# Altium PCB Hall Digital Sensor.PcbDoc
Units mm, origin at the board's own origin, x right, y up, seen from the top; angles counter-clockwise.
Board outline 152.4 x 101.6 mm, 2 copper layers (Top Layer, Bottom Layer); 6 components, 5 nets, 16 pads, 1 vias.
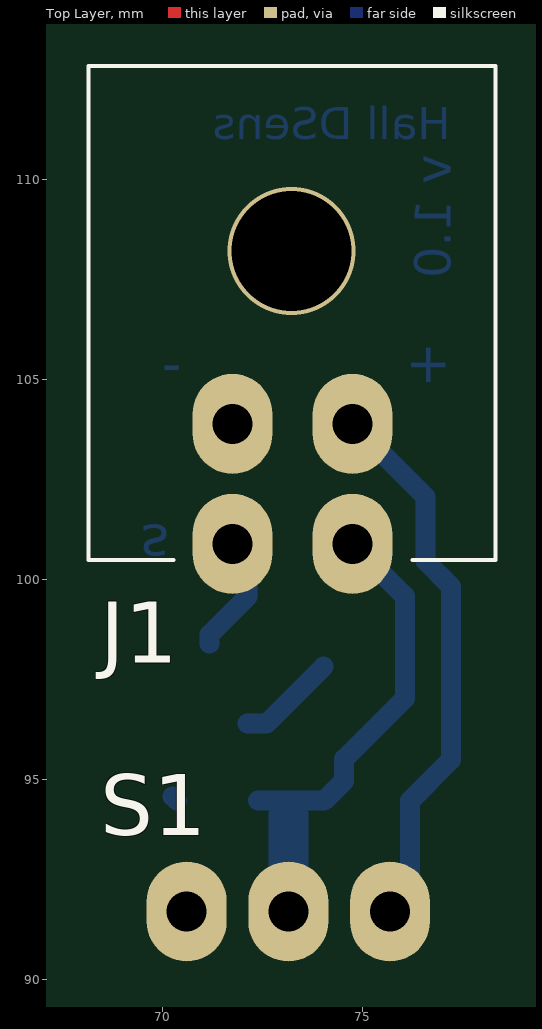
[diagram p0: Top Layer view]
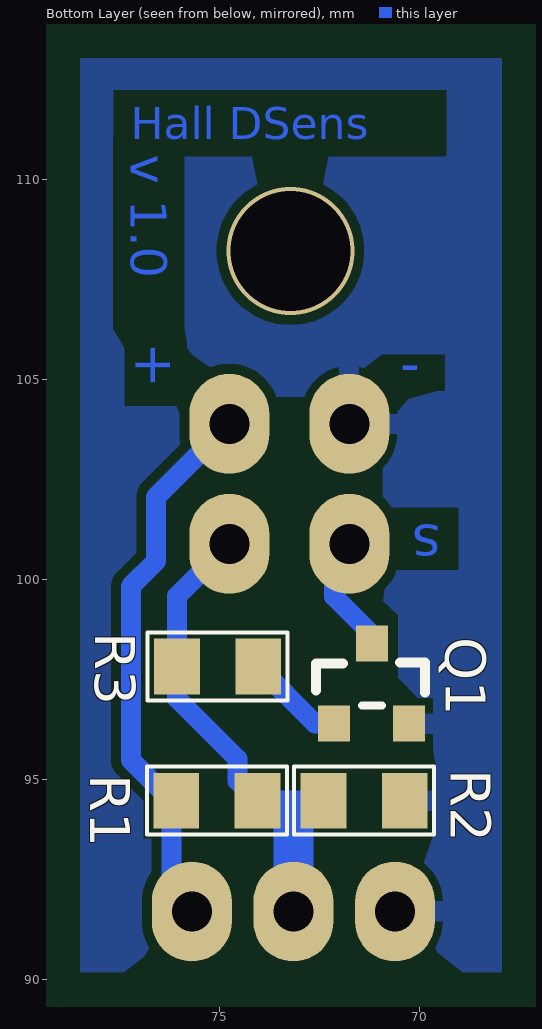
[diagram p1: Bottom Layer view, seen from below]
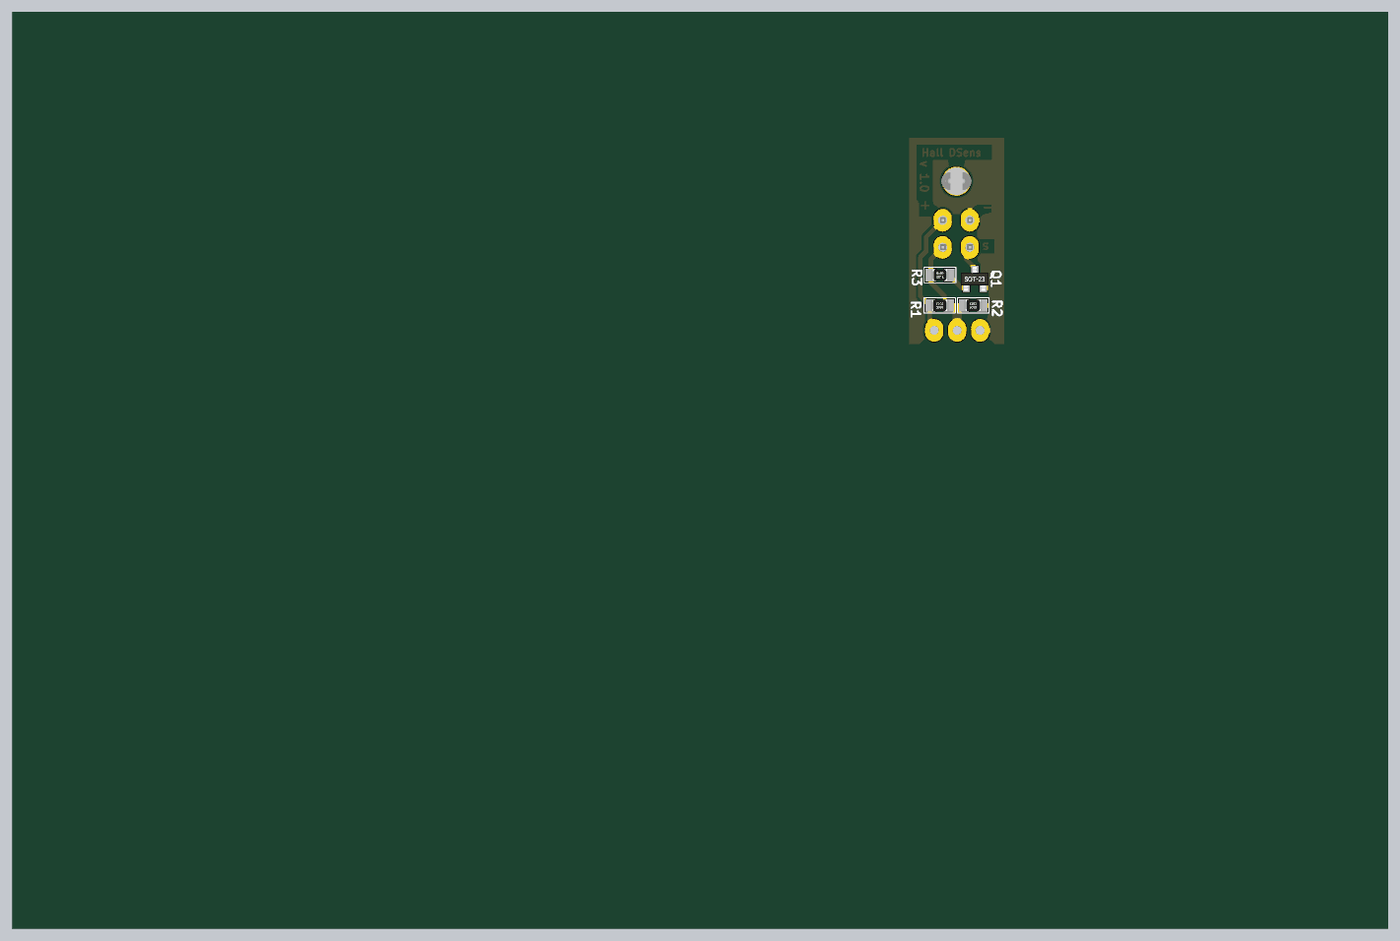
[diagram p2: 3D render of the assembled board from below, using the file's embedded part models]

## Layer stack, top to bottom
Top Solder: solder mask 0.0102, Solder Resist, Dk 3.5
Top Layer: signal copper 0.0356
Dielectric 1: dielectric 0.32, FR-4, Dk 4.8
Bottom Layer: signal copper 0.0356
Bottom Solder: solder mask 0.0102, Solder Resist, Dk 3.5

## Board outline
25.4,25.4 177.8,25.4 177.8,127 25.4,127

## Design rules (kind name [scope] priority, off if disabled: settings)
Clearance [All] p1: gap=0.254
PlaneConnect [All] p1: planeconnectstyle=Relief reliefexpansion=0.508 reliefentries=4 reliefconductorwidth=0.254 reliefairgap=0.5
PolygonConnect [All] p1: connectstyle=Relief reliefconductorwidth=0.5 reliefentries=4 polygonreliefangle="90 Angle" airgapwidth=0.2
RoutingVias [All] p1: holewidth=0.711 width=1.27 viastyle="Through Hole" minholewidth=0.711 minwidth=1.27 maxholewidth=0.711 maxwidth=1.27
SolderMaskExpansion [All] p1: expansion=0.102
Width [All] p1: maxlimit=2 minlimit=0.254 preferedwidth=0.5
28 further rules are at their usual default settings.

## Components (designator, comment, footprint, x,y, rotation, side; value= is the part's Value field where it differs from the comment)
J1 "Connector" "Molex Micro-Fit 3.0 - 4 pin D R" 71.755,103.886 r180 top
Q1 "BC817-40" SOT-23 72.136,96.393 r180 bottom
R1 "10kOm" "SMD 0805 (2012)" 74.041,94.488 r0 bottom
R2 "10kOm" "SMD 0805 (2012)" 70.358,94.488 r0 bottom
R3 "330Om" "SMD 0805 (2012)" 76.073,97.79 r180 bottom
S1 "Hall Sens" "Hall Sensor 3Pin" 70.612,91.694 r90 top

## Footprints (in the part's own frame and the unit in brackets; to place one, negate y for a bottom-side part, rotate by r counter-clockwise, add the part's x,y. Pads: shape width x height; smd on the part's side, far side on the other; paste and mask are expansions set on the pad)
"Hall Sensor 3Pin" [mm]
  oval 2.5x2 hole 1: Gnd(0,0) O+(0,-2.54) Vcc(0,-5.08)
  body extent -0.5,-6 0.5,1, height 6
"Molex Micro-Fit 3.0 - 4 pin D R" [mm]
  oval 2x2.5 hole 1: 1(0,0) 2(-3,0) 3(0,3) 4(-3,3)
  silkscreen extent -6.58,-8.95 3.6,3.4, body extent -6.55,-8.94 3.6,3.3, height 8.83
"SMD 0805 (2012)" [mil]
  rect 45x55 smd: 1(0.35,0.98) 2(80.35,0.98)
  silkscreen extent -29,-32 109,34, body extent 1,-24 80,26, height 18
SOT-23 [mm]
  rect 0.8x0.9 smd: 1(0,0) 2(1.875,0) 3(0.95,2)
  silkscreen extent -0.45,0.45 2.27,1.53, body extent -0.57,-0.32 2.43,2.32, height 1.08

## Part data
J1: library part "Micro-Fit 4R (2x2)", "Horisontal, Dbl line, Male - 3mm"
Q1: "NPN 45 V, 500 mA NPN general-purpose transistor"
R1 R2 R3: library part "Res All Types"
S1: library part "Hall Sensor K1116KP8"

## Via types
v1: diameter 3.2, hole 3, Top Layer to Bottom Layer, 1 vias

## Nets (pads, with @x,y where several pads share a name; then routed paths per layer and width w, separated by ;. In a path a pad name is that pad's centre, name@x,y a point inside that pad or via, vN(x,y) a via of type N, cw(c..) or ccw(c..) an arc to the next point about the centre after c; other vN are vias at no path point)
GND: J1.1 Q1.2 R2.1 S1.Gnd | length 0.1
  Bottom Layer w0.5: R2.1@70.261,94.569 R2.1
NetQ1_1: Q1.1 R3.2 | length 2.5
  Bottom Layer w0.5: Q1.1 72.61,96.393 R3.2
SENSAN: J1.4 R1.1 R2.2 R3.1 S1.O+ | length 11.9
  Bottom Layer w0.5: R2.2 R1.1 74.549,94.962 74.549,95.504 76.064,97.019 R3.1 76.064,99.577 J1.4
  Bottom Layer w1: S1.O+ 73.152,94.107
SENSOUT: J1.3 Q1.3 | length 3
  Bottom Layer w0.5: Q1.3 71.186,98.618 72.136,99.568 72.136,100.505 J1.3
VCC: J1.2 R1.2 S1.Vcc | length 14.1
  Bottom Layer w0.5: J1.2 76.581,102.06 76.581,100.457 77.216,99.822 77.216,95.479 76.2,94.463 76.2,91.694 S1.Vcc
copper on no net:
  other v1: 73.23,108.211

## Polygon pours and split planes (outlines as drawn)
GND on Bottom Layer "Top Layer-No Net" (solid, remove dead copper, pour order 2): 67.945,113.03 78.486,113.03 78.486,90.17 67.945,90.17 67.945,113.03

## Other copper
Bottom Layer:
  text "Hall DSens" at 77.216,110.998 h0.8
  text "v 1.0" at 77.216,110.617 h0.9 r90
  text "-" at 70.485,105.664 h1 r180
  text "+" at 77.089,104.775 h1 r90
  text "s" at 69.469,101.346 h1 r180